# Altium PCB PDB.PcbDoc
Units mm, origin at the board's own origin, x right, y up, seen from the top; angles counter-clockwise.
Board outline 29.39 x 21 mm, 2 copper layers (Top Layer, Bottom Layer), stack 0.971 mm thick; 13 components, 9 nets, 37 pads, 8 vias.
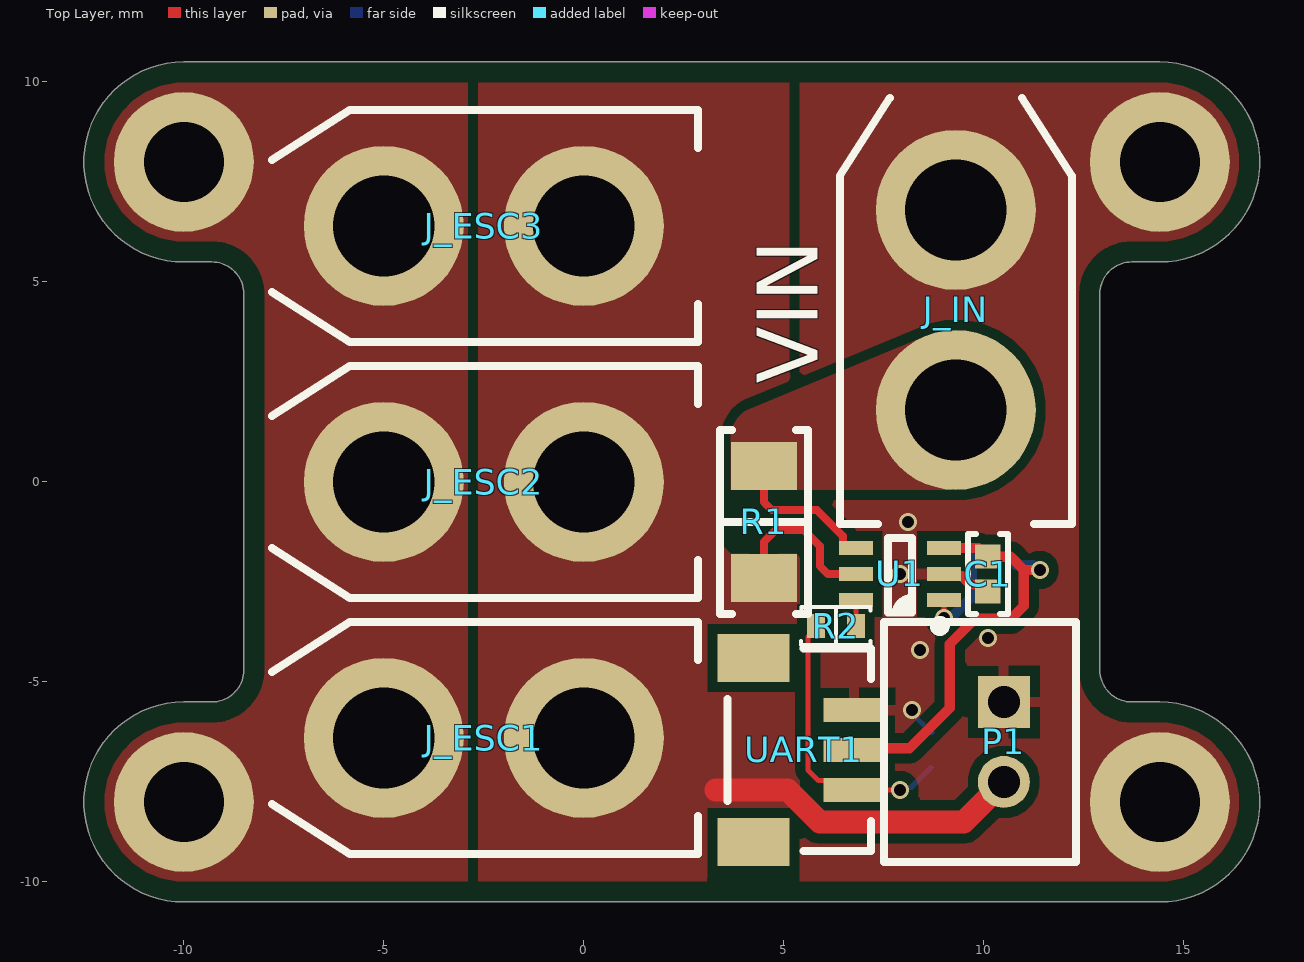
[diagram p0: Top Layer view]
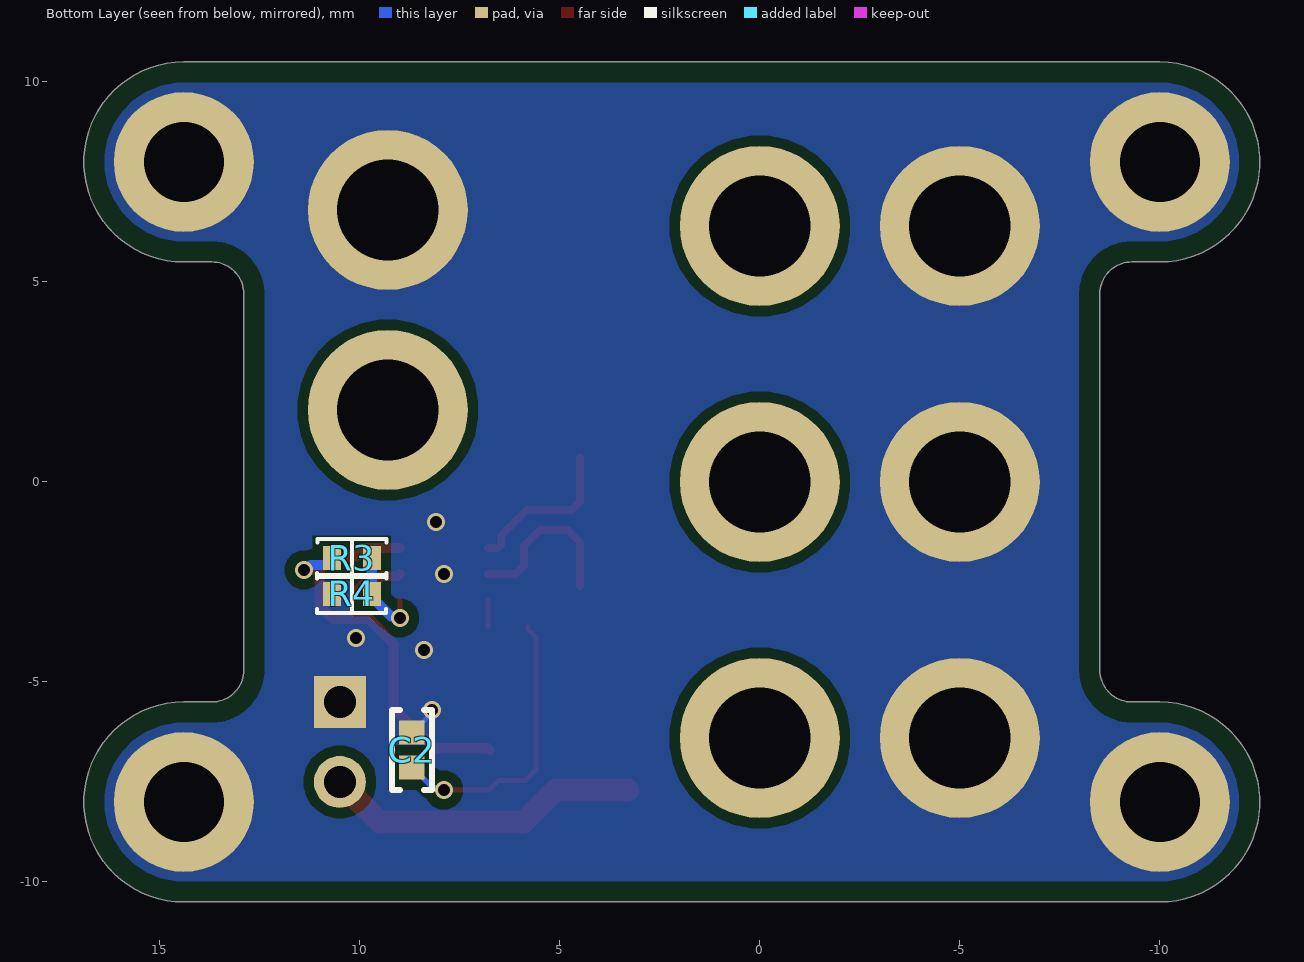
[diagram p1: Bottom Layer view, seen from below]

## Layer stack, top to bottom
Top Solder: solder mask 0.0102, Solder Resist, Dk 3.5
Top Layer: signal copper 0.0356
Dielectric 1: dielectric 0.9, FR-4, Dk 4.8
Bottom Layer: signal copper 0.0356
Bottom Solder: solder mask 0.0102, Solder Resist, Dk 3.5

## Board outline
-10,-5.5 -9.3,-5.5 ccw(c-9.3,-4.7) -8.5,-4.7 -8.5,4.7 ccw(c-9.3,4.7) -9.3,5.5 -10,5.5 cw(c-10,8) -10,10.5 14.4,10.5 cw(c14.4,8) 14.4,5.5 13.7,5.5 ccw(c13.7,4.7) 12.9,4.7 12.9,-4.7 ccw(c13.7,-4.7) 13.7,-5.5 14.4,-5.5 cw(c14.4,-8) 14.4,-10.5 -10,-10.5 cw(c-10,-8)

## Design rules (kind name [scope] priority, off if disabled: settings)
BoardOutlineClearance [All] p1: gap=0.512 ignorepadtopadclearanceinfootprint=FALSE
Clearance "PolyGon Pour Clearance" [InPolygon] p1: gap=0.254 ignorepadtopadclearanceinfootprint=FALSE except(0.512: Arc-Text Track-Text SMDPad-Text THPad-Text Via-Text Fill-Text Poly-Text Region-Text Text-Text)
Clearance [All] p2: gap=0.127 ignorepadtopadclearanceinfootprint=TRUE
HoleSize [All] p1: absolutevalues=TRUE maxlimit=10 minlimit=0.025 maxpercent=80.000 minpercent=20.000
PolygonConnect PolygonRelief [IsPolygon and not (IsNamedPolygon('PolygonDIrect'))] p1: thpad.connectstyle=Relief thpad.reliefconductorwidth=0.254 thpad.reliefentries=4 thpad.polygonreliefangle="90 Angle" thpad.airgapwidth=0.254 smdpad.connectstyle=Relief smdpad.reliefconductorwidth=0.254 smdpad.reliefentries=4 smdpad.polygonreliefangle="90 Angle" smdpad.airgapwidth=0.254 via.connectstyle=Direct via.reliefconductorwidth=0.254 via.reliefentries=4 via.polygonreliefangle="90 Angle" via.airgapwidth=0.254
PolygonConnect PolygonDirect [All] p2: connectstyle=Direct reliefconductorwidth=0.254 reliefentries=4 polygonreliefangle="90 Angle" airgapwidth=0.254
RoutingVias [All] p1: holewidth=0.3 width=0.5 viastyle="Through Hole" minholewidth=0.3 minwidth=0.45 maxholewidth=0.7 maxwidth=1.27
SolderMaskExpansion [All] p1: expansion=0.102 istentingtop=FALSE
SupplyNets "Schematic Supply Nets_2" [InNet('3V3')] p1: voltage=0.000
SupplyNets "Schematic Supply Nets" [InNet('VBAT')] p2: voltage=0.000
SupplyNets "Schematic Supply Nets_3" [InNet('GND')] p3: voltage=0.000
Width [All] p1: maxlimit=2 minlimit=0.127 preferedwidth=0.254 minimp=50.000000 maximp=50.000000 favimp=50.000000
29 further rules are at their usual default settings.

## Components (designator, comment, footprint, x,y, rotation, side; value= is the part's Value field where it differs from the comment)
C1 "0.1 µF" "CAP 0402_1005" 10.1,-2.3 r270 top
C2 "0.1 µF" "CAP 0402_1005" 8.7,-6.7 r90 bottom
J_ESC1 "XT30" XT30 -2.5,-6.4 r180 top
J_ESC2 "XT30" XT30 -2.5,0 r180 top
J_ESC3 "XT30" XT30 -2.5,6.4 r180 top
J_IN "XT30" XT30 9.3,4.3 r90 top
P1 "2 pin 2mm JST Male" "2pin - 2mm JST male" 10.5,-6.5 r270 top
R1 "10 mOhms" "RES 1206_3216" 4.5,-1 r270 top value="39 mOhms"
R2 "10k" RES_0402 6.3,-3.6 r0 top
R3 "10k" RES_0402 10.2,-1.9 r180 bottom
R4 "4.7k" RES_0402 10.2,-2.8 r0 bottom
U1 "INA185" "TI SC70-6 DCK" 7.9,-2.3 r180 top
UART1 "BM03B-SRSS-TB(LF)(SN)" "JST BM03B-SRSS-TB" 5.5,-6.7 r90 top

## Footprints (in the part's own frame and the unit in brackets; to place one, negate y for a bottom-side part, rotate by r counter-clockwise, add the part's x,y. Pads: shape width x height; smd on the part's side, far side on the other; paste and mask are expansions set on the pad)
"2pin - 2mm JST male" [mm]
  rect 1.3x1.3 hole 0.8: 1(-1,0)
  round 1.3 hole 0.8: 2(1,0)
  silkscreen extent -3,-3 3,1.8, body extent -2.93,-2.97 2.93,1.7, height 5.89
"CAP 0402_1005" [mm] "Chip Capacitor, 2-Leads, Body 1.02x0.51mm, IPC Medium Density"
  rect 0.6x0.64 smd: 1(-0.44,0) 2(0.44,0)
  silkscreen extent -1,-0.5 1,0.5, body extent -0.5,-0.26 0.5,0.26, height 0.52
"JST BM03B-SRSS-TB" [mm] "1.0mm pitch/Disconnectable Crimp style connector"
  rect 0.6x1.55 smd: 1(-1,-1.262) 2(0,-1.262) 3(1,-1.262)
  rect 1.2x1.8 smd: M(-2.3,1.262) M(2.3,1.262)
  silkscreen extent -2.53,-1.68 2.53,1.91, body extent -2.5,-1.69 2.5,1.91, height 4.32
"RES 1206_3216" [mm] "Chip Resistor, 2-Leads, Body 3.13x1.55mm, IPC Medium Density"
  rect 1.2x1.65 smd: 1(-1.4,0) 2(1.4,0)
  silkscreen extent -2.3,-1.1 2.3,1.1, body extent -1.6,-0.8 1.6,0.8, height 0.6
RES_0402 [mm]
  rect 0.45x0.6 smd: 1(-0.5,0) 2(0.5,0)
  silkscreen extent -0.87,-0.47 0.87,0.47, body extent -0.5,-0.25 0.5,0.25, height 0.35
"TI SC70-6 DCK" [mm] "SC70, 6-Leads, Body 2.00x2.10mm, Pitch 0.65mm, IPC Medium Density"
  rect 0.85x0.35 smd: 1(-1.1,0.65) 2(-1.1,0) 3(-1.1,-0.65) 4(1.1,-0.65) 5(1.1,0) 6(1.1,0.65)
  silkscreen extent -1.13,-0.9 0.3,1.42, body extent -1.06,-1 1.06,1, height 1.1
XT30 [mm]
  round 4 hole 2.53: 1(-2.5,0) 2(2.5,0)
  silkscreen extent -5.35,-2.9 5.3,2.9, body extent -5.5,-3.05 5.5,3.05, height 12.9

## Part data
C1 C2: library part C0402C104K4RACAUTO, "CAP CER 0.1UF 16V X7R 0402", Device Package="0402 (1005 Metric)", Manufacturer=KEMET, Operating Temperature="-55°C ~ 125°C", Ratings=AEC-Q200, Supplier Part Number 1=399-6828-1-ND, Temperature Coefficient=X7R, Tolerance=±10%, Voltage - Rated=16V, Applications="Automotive, Bypass, Decoupling", Capacitance="0.1 µF", ComponentLink1Description=Datasheet, ComponentLink1URL=https://api.kemet.com/component-edge/download/specsheet/C0402C104K4RACAUTO.pdf, ComponentLink2Description="DigiKey Link", ComponentLink2URL=https://www.digikey.com/en/products/detail/kemet/C0402C104K4RACAUTO/3314827, LastUpdated="2/9/2024 8:04:35 PM", Lifecycle Status=Active, Minimum Order=1, Mounting Type="Surface Mount, MLCC", Package / Case="0402 (1005 Metric)", Packaging=TapeAndReel, Part Number=C0402C104K4RACAUTO, Part Status=Active, PartId=3024, Price=0.01, Series="SMD Auto X7R", Size / Dimension="0.039\" L x 0.020\" W (1.00mm x 0.50mm)", Supplier 1=DigiKey, Thickness (Max)="0.022\" (0.55mm)"
R1: library part KRL1632E-M-R039-F-T5, "RES 0.039 OHM 1% 3/4W 1206", Device Package="1206 (3216 Metric)", Manufacturer=Susumu, Operating Temperature="-55°C ~ 155°C", Power (Watts)="0.75W, 3/4W", Ratings=AEC-Q200, Resistance="39 mOhms", Supplier Device Package=1206, Supplier Part Number 1=408-1577-1-ND, Temperature Coefficient=±50ppm/°C, Tolerance=±1%, ComponentLink1Description=Datasheet, ComponentLink1URL=http://www.susumu.co.jp/common/pdf/n_catalog_partition09_en.pdf, ComponentLink2Description="DigiKey Link", ComponentLink2URL=https://www.digikey.com/en/products/detail/susumu/KRL1632E-M-R039-F-T5/3738003, Composition="Metal Foil", Features="Automotive AEC-Q200, Current Sense", Height - Seated (Max)="0.028\" (0.70mm)", LastUpdated="2/9/2024 8:54:46 PM", Lifecycle Status=Active, Minimum Order=1, Number of Terminations=2, Package / Case="1206 (3216 Metric)", Packaging=TapeAndReel, Part Number=KRL1632E-M-R039-F-T5, Part Status=Active, PartId=26838, Price=0.09, Series=KRL, Size / Dimension="0.126\" L x 0.063\" W (3.20mm x 1.60mm)", Supplier 1=DigiKey
R2 R3 R4: library part RES_0402, "RES 0402"
U1: "INA185A2"
UART1: "CONN HEADER SMD 3POS 1MM", Current Rating (Amps)=0.7A, Insulation Color=Natural, Manufacturer="JST Sales America Inc.", Material Flammability Rating="UL94 V-0", Operating Temperature="-25°C ~ 85°C", Supplier Part Number 1=455-1789-1-ND, Voltage Rating=50V, ComponentLink1Description=Datasheet, ComponentLink1URL=http://www.jst-mfg.com/product/pdf/eng/eSR.pdf, ComponentLink2Description="DigiKey Link", ComponentLink2URL=http://digikey.com/product-detail/en/jst-sales-america-inc/BM03B-SRSS-TB-LF-SN/455-1789-1-ND/926860, Connector Type=Header, Contact Finish - Mating=Tin, Contact Finish - Post=Tin, Contact Material="Copper Alloy", Contact Shape=Square, Contact Type="Male Pin", Fastening Type=Push-Pull, Features="Solder Retention", Insulation Height="0.167\" (4.25mm)", Insulation Material="Polyamide (PA), Nylon", LastUpdated="1/12/2020 10:12:14 PM", Lifecycle Status=Active, Minimum Order=1, Mounting Type="Surface Mount", Number of Positions=3, Number of Positions Loaded=All, Number of Rows=1, Packaging=TapeAndReel, Part Number=BM03B-SRSS-TB(LF)(SN), Part Status=Active, PartId=14, Pitch - Mating="0.039\" (1.00mm)", Price=0.24, Series=SR, Shrouding="Shrouded - 4 Wall", Style="Board to Cable/Wire", Supplier 1=DigiKey, Termination=Solder

## Free pads (board coordinates)
  round 3.5 hole 2 unplated: 1(-10,-8) 1(-10,8) 1(14.4,-8) 1(14.4,8)

## Via types
v1: diameter 0.45, hole 0.3, Top Layer to Bottom Layer, tented both sides, 8 vias

## Nets (pads, with @x,y where several pads share a name; then routed paths per layer and width w, separated by ;. In a path a pad name is that pad's centre, name@x,y a point inside that pad or via, vN(x,y) a via of type N, cw(c..) or ccw(c..) an arc to the next point about the centre after c; other vN are vias at no path point)
3V3: C1.1 R3.1 U1.3 UART1.2 | length 11
  Top Layer w0.254: UART1.2 6.804,-6.659 8.141,-6.659 9.15,-5.65 9.15,-4.05 9.779,-3.421 10.679,-3.421 11,-3.1 11,-2.2 ; U1.3 9.87,-1.65 10.08,-1.86 C1.1 ; C1.1@10.171,-1.871 10.671,-1.871 11,-2.2 ; v1(11.4,-2.2) 11,-2.2
  Bottom Layer w0.254: R3.1 10.7,-1.975 10.798,-2.073 11.22,-2.073 11.347,-2.2 v1(11.4,-2.2)
GND: C1.2 C2.2 J_ESC1.2 J_ESC2.2 J_ESC3.2 J_IN.2 P1.1 pad.1 R4.2 U1.2 UART1.3 | length 2.1
  Top Layer w0.254: U1.2 9.048,-2.348 9.448,-2.348 9.667,-2.567 9.927,-2.567 C1.2
  Bottom Layer w0.127: v1(8.2,-5.7) 8.2,-5.78 8.68,-6.26 C2.2
  other v1: 8.4,-4.2 10.1,-3.9 7.9,-2.3 8.1,-1
ISNS_VIN: C2.1 R2.1 UART1.1 | length 7.2
  Top Layer w0.127: R2.1 5.8,-3.675 5.6,-3.875 5.6,-7.2 5.863,-7.463 6.526,-7.463 UART1.1 v1(7.9,-7.7)
  Bottom Layer w0.127: v1(7.9,-7.7) 7.962,-7.638 8.182,-7.638 8.68,-7.14 C2.1
ISNS_VIN_R: R2.2 U1.6 | length 0.6
  Top Layer w0.127: R2.2 U1.6
VBAT: J_ESC1.1 J_ESC2.1 J_ESC3.1 P1.2 R1.2 | length 7.9
  Top Layer w0.57: 3.3,-7.7 5.1,-7.7 5.9,-8.5 9.5,-8.5 P1.2
VBAT_ISNS_N: U1.5 | length 4.1
  Top Layer w0.2: 4.5,-2.4 4.5,-1.5 4.8,-1.2 5.5,-1.2 5.9,-1.6 5.9,-2.1 6.1,-2.3 U1.5
VBAT_ISNS_P: U1.4 | length 4
  Top Layer w0.2: 4.5,0.6 4.5,-0.5 4.7,-0.7 5.825,-0.7 6.475,-1.35 6.475,-1.575 6.55,-1.65 U1.4
VBAT_ISNS_REF: R3.2 R4.1 U1.1 | length 2.4
  Top Layer w0.127: v1(9,-3.4) U1.1
  Bottom Layer w0.254: v1(9,-3.4) 9.038,-3.362 9.213,-3.362 R4.1@9.7,-2.875 ; R4.1@9.7,-2.9 R4.1@9.7,-2.875 ; R3.2 R4.1 R4.1@9.7,-2.875
VIN: J_IN.1 R1.1
pads on no net: UART1.M
copper on no net: | length 0.2
  Top Layer w0.2: 4.5,-2.6 4.5,-2.4

## Polygon pours and split planes (outlines as drawn)
VIN on Top Layer "PolygonDirect" (solid, pour order 7): 3.675,-0.2 3.675,1.088 cw(c4.499,1.088) 4.101,1.81 8.654,3.693 9.3,-0.2 5.325,-0.2
GND on Top Layer "PolygonDirect" (solid, pour order 1): -12.5,10.5 -2.9,10.5 -2.9,-10.5 -12.5,-10.5
VBAT on Top Layer "PolygonDirect" (solid, pour order 11): -2.8,10.5 -2.8,-12 5.4,-12 5.4,10.5
GND on Top Layer "NONET_L03_P-001" (solid, pour order 8): 5.4,10.5 5.4,-10.5 16.9,-10.5 16.9,10.5
GND on Top Layer "PolygonDirect" (solid, pour order 9): 6.6,9.3 12,9.3 12,4.2 6.6,4.2
GND on Bottom Layer "PolygonDirect" (solid, pour order 4): -12.5,10.5 -12.5,-10.5 16.9,-10.5 16.9,10.5

## Other copper
Top Layer:
  pour cut-out: 3.675,-1.8 3.4,-1.525 3.4,-0.475 3.421,-0.454 3.979,-0.454 5.325,-1.8

## Silkscreen, mask and mechanical layers (free items; w line width, h text height)
Top Overlay:
  text "VIN" at 5.846,2.454 h1.52 r90
Board:
  the board outline again, w0.1